# Altium PCB 3轴5.2-PCB-V3.3.PcbDoc (part 1 of 2)
Units mil, origin at the board's own origin, x right, y up, seen from the top; angles counter-clockwise.
Board outline 6000 x 4000 mil, 2 copper layers (Top Layer, Bottom Layer); 198 components, 135 nets, 695 pads, 606 vias.
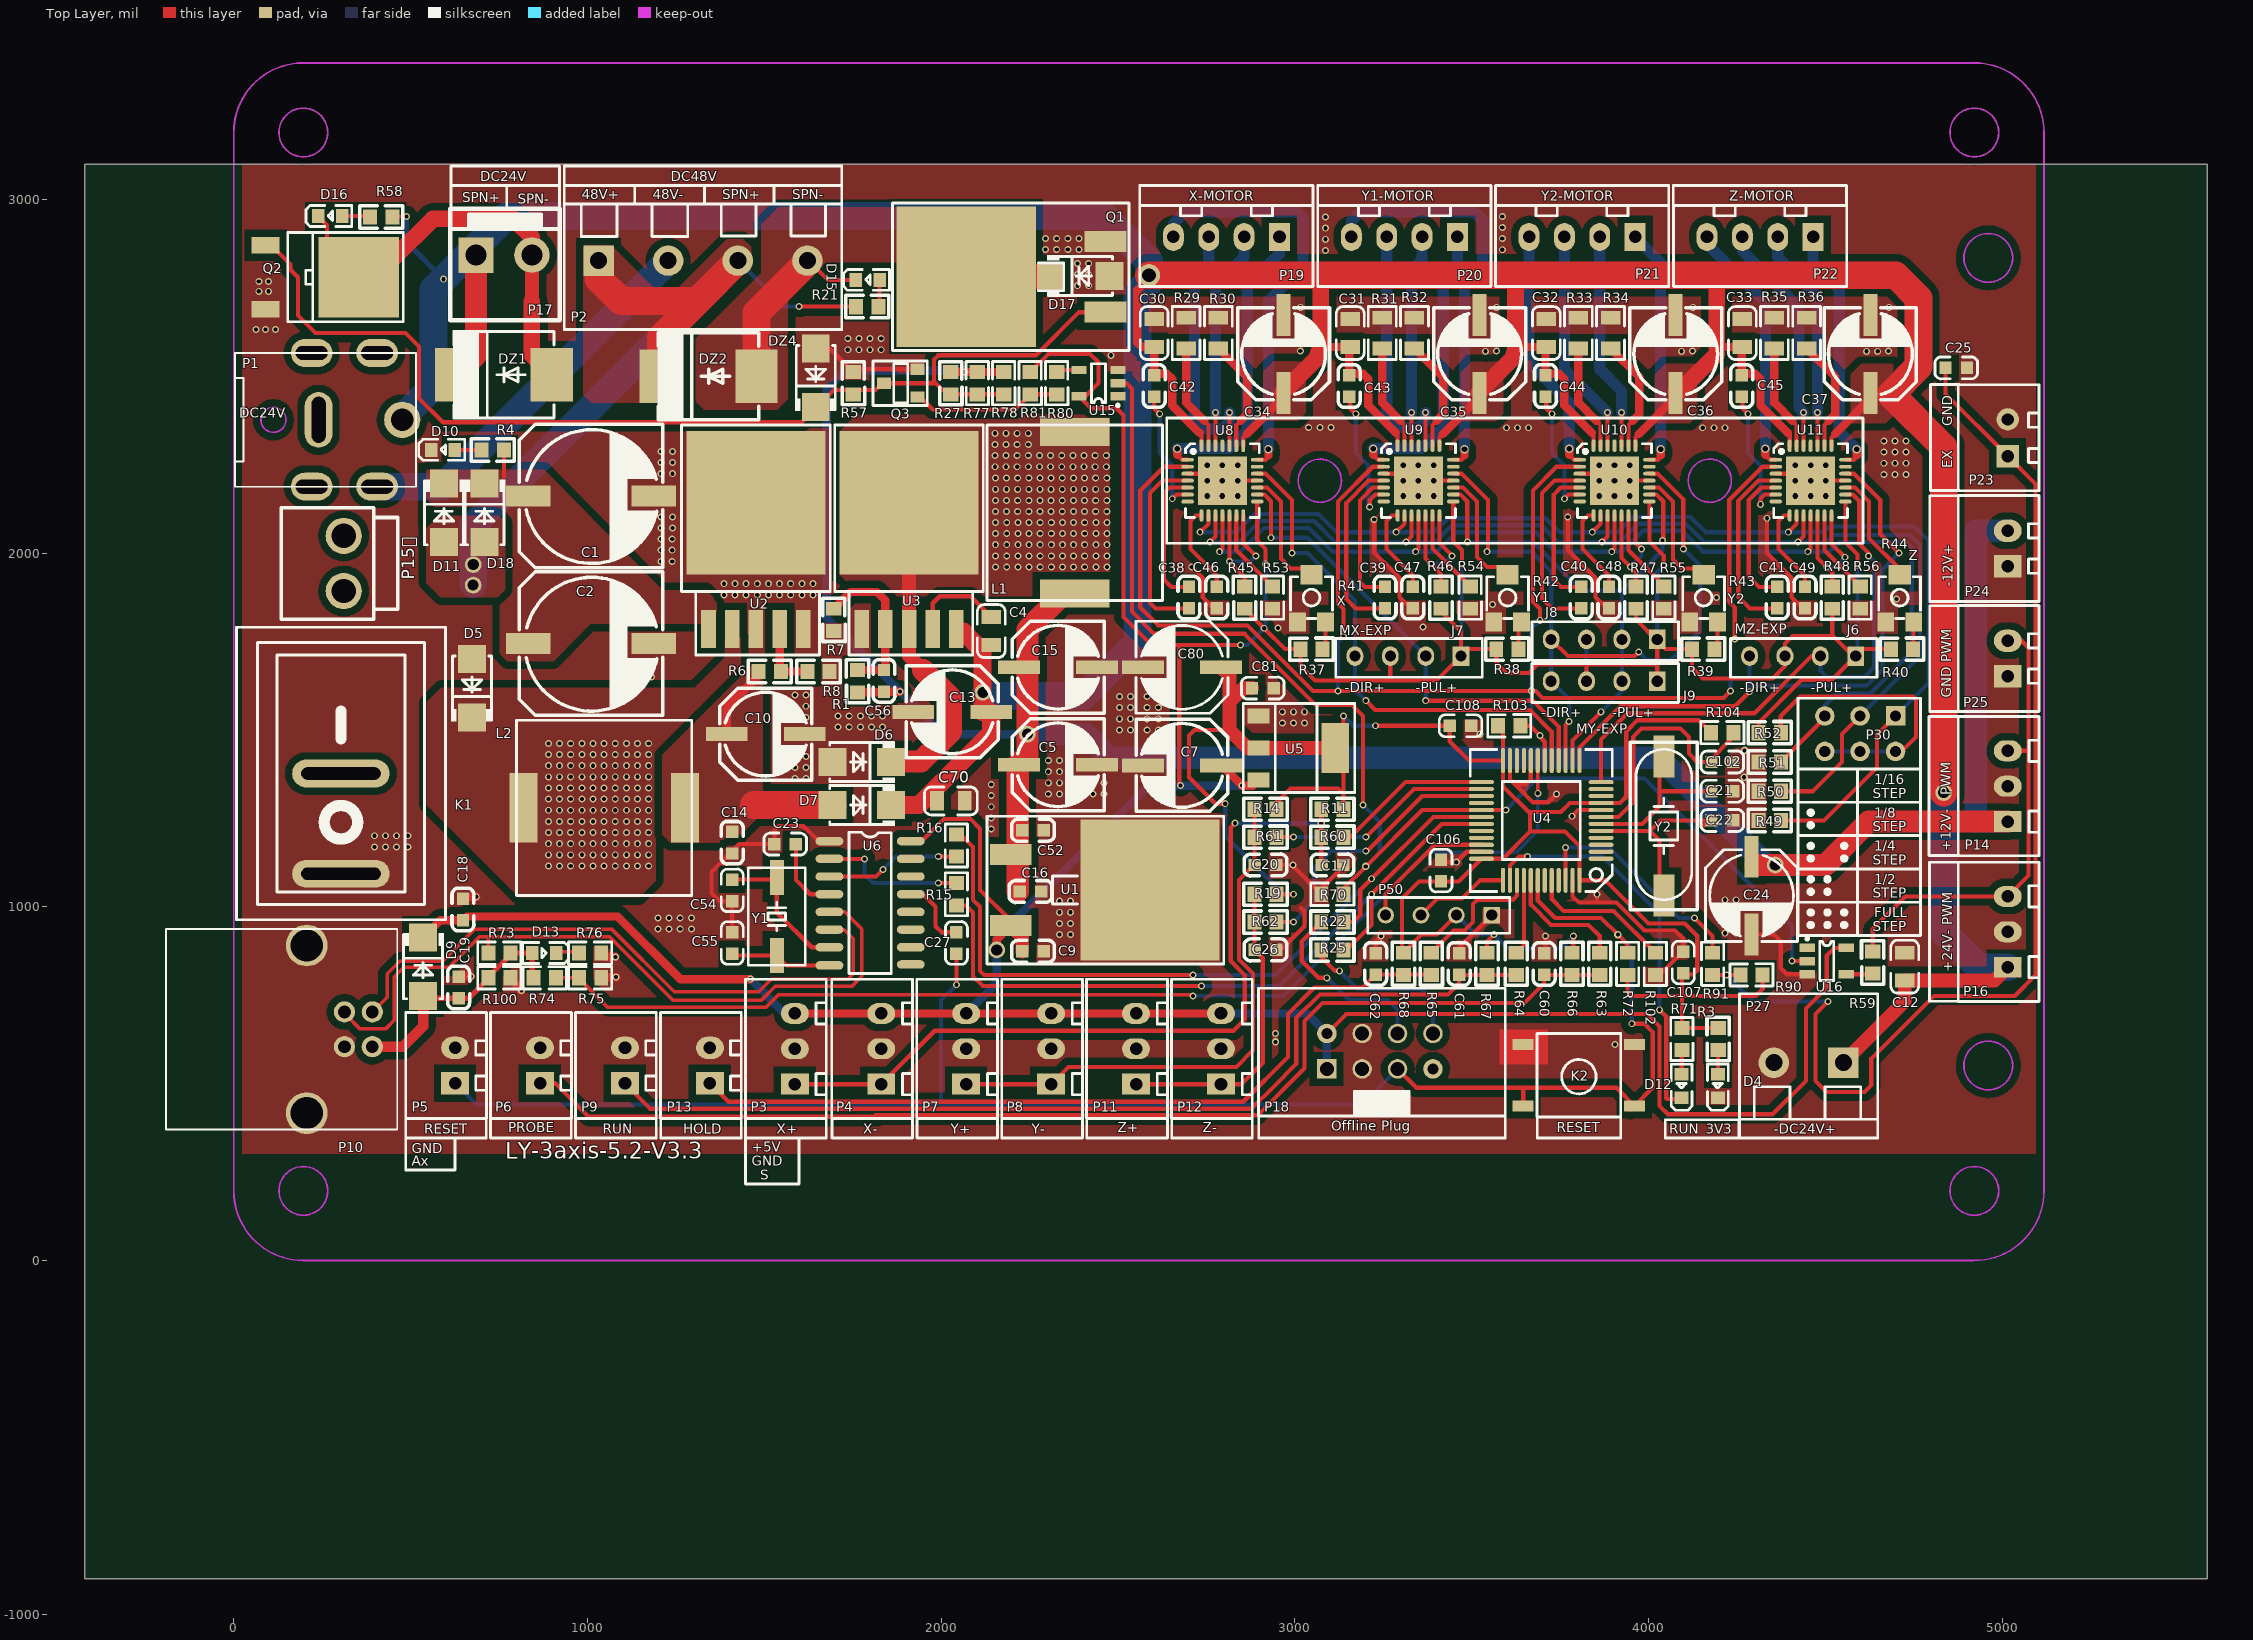
[diagram p0: Top Layer view]
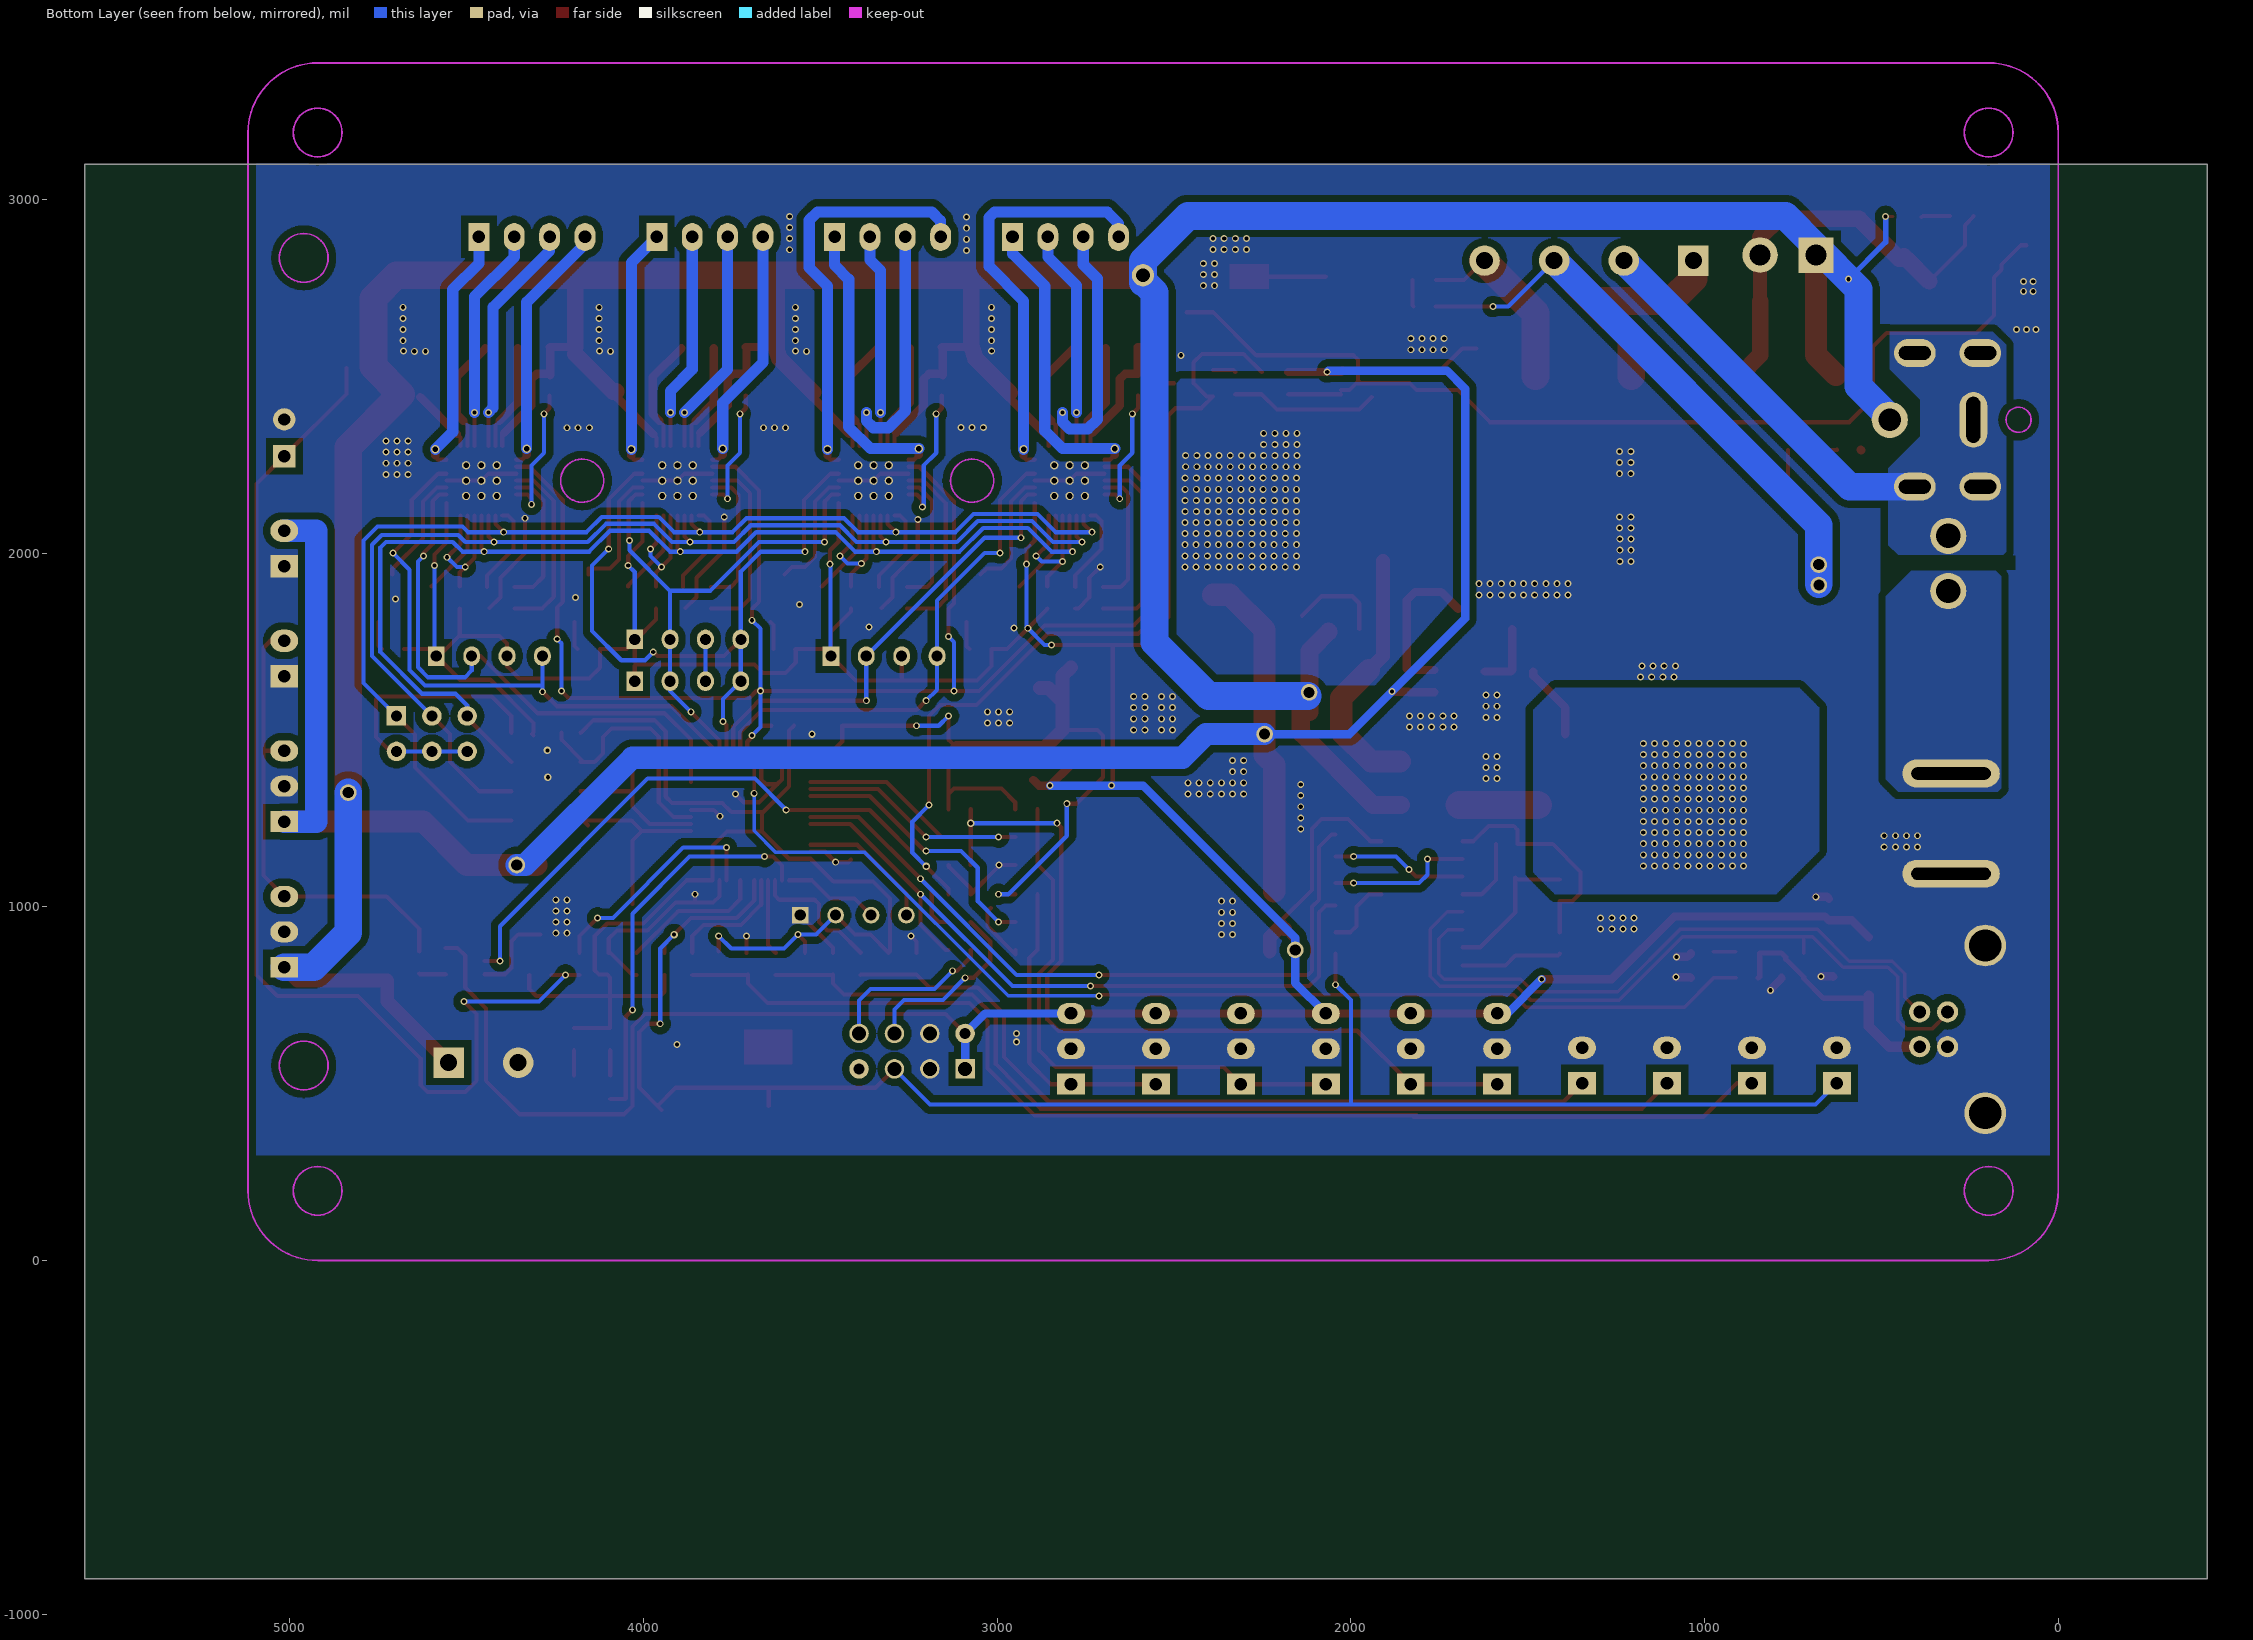
[diagram p1: Bottom Layer view, seen from below]

## Layer stack, top to bottom
Top Solder: solder mask 0.4, Solder Resist, Dk 3.5
Top Layer: signal copper 1.4
Dielectric1: dielectric 12.6, FR-4, Dk 4.8
Bottom Layer: signal copper 1.4
Bottom Solder: solder mask 0.4, Solder Resist, Dk 3.5

## Board outline
-420.71,-900.32 5579.29,-900.32 5579.29,3099.68 -420.71,3099.68

## Design rules (kind name [scope] priority, off if disabled: settings)
Clearance Polygon [InPolygon] p1: gap=20 ignorepadtopadclearanceinfootprint=FALSE
Clearance [All] p2: gap=7 ignorepadtopadclearanceinfootprint=FALSE except(0: Arc-Hole Track-Hole SMDPad-Hole THPad-Hole Via-Hole Fill-Hole Poly-Hole Region-Hole Text-Hole)
ComponentClearance [All] p1 off: gap=10 collisioncheckmode=3 verticalgap=10 showdistances=FALSE
HoleSize [All] p1: absolutevalues=TRUE maxlimit=1000 minlimit=1 maxpercent=80.000 minpercent=20.000
MinimumSolderMaskSliver [All] p1 off: minsoldermaskwidth=10
PolygonConnect [All] p1: connectstyle=Direct reliefconductorwidth=11.81 reliefentries=4 polygonreliefangle="90 Angle" airgapwidth=10
RoutingVias [All] p1: holewidth=23.62 width=31.5 viastyle="Through Hole" minholewidth=11.81 minwidth=11.81 maxholewidth=78.74 maxwidth=50
SilkToSilkClearance [All] p1 off: silktosilkclearance=10
SilkToSolderMaskClearance SilkscreenOverComponentPads [IsPad] p1 off: minsilkscreentomaskgap=10 clearancetoexposedcopper=TRUE
SolderMaskExpansion [All] p1: expansion=4
Width [All] p1: maxlimit=196.85 minlimit=0.39 preferedwidth=10
25 further rules are at their usual default settings.

## Components (designator, comment, footprint, x,y, rotation, side; value= is the part's Value field where it differs from the comment)
C1 "100uF/63V" 电解电容贴片10x10 1000,2157.48 r0 top
C2 "100uF/63V" 电解电容贴片10x10 1000,1740.16 r0 top
C4 "105" 0805C 2141.73,1779.53 r270 top
C5 "100uF/35V" 电解电容贴片6X6 2330.71,1401.57 r0 top
C7 "100uF/35V" 电解电容贴片6X6 2681.25,1399.82 r180 top
C9 "104" 0603C 2259.84,874.02 r180 top
C10 "100uF/35V" 电解电容贴片6X6 1503.94,1488.19 r0 top
C12 "105" 0805C 4724.41,830.71 r90 top
C13 "100uF/35V" 电解电容贴片6X6 2031.5,1551.18 r180 top
C14 "104" 0603C 1409.45,1181.1 r90 top
C15 "100uF/35V" 电解电容贴片6X6 2330.71,1677.17 r0 top
C16 "104" 0603C 2252.96,1043.31 r180 top
C17 "103" 0603C 3106.3,1118.11 r180 top
C18 "104" 0603C 648.18,992.13 r270 top
C19 "104" 0603C 635.83,771.65 r270 top
C20 "103" 0603C 2917.33,1118.11 r180 top
C21 "22pF" 0603C 4208.66,1326.77 r0 top
C22 "22pF" 0603C 4208.66,1244.09 r0 top
C23 "103" 0603C 1559.06,1177.17 r180 top
C24 "100uF/35V" 电解电容贴片6x6 4291.34,1031.5 r270 top
C25 "103?" 0603C 4870.08,2523.62 r180 top
C26 "103" 0603C 2917.33,877.95 r180 top
C27 "104" 0603C 2043.31,897.64 r270 top
C30 "105" 0805C 2602.36,2622.05 r90 top
C31 "105" 0805C 3156.69,2622.05 r90 top
C32 "105" 0805C 3711.02,2622.05 r90 top
C33 "105" 0805C 4265.35,2622.05 r90 top
C34 "47uF/50V" 电解电容贴片6X6 2968.24,2562.99 r90 top
C35 "47uF/50V" 电解电容贴片6X6 3522.58,2562.99 r90 top
C36 "47uF/50V" 电解电容贴片6X6 4076.91,2562.99 r90 top
C37 "47uF/50V" 电解电容贴片6X6 4627.3,2562.99 r90 top
C38 "104" 0603C 2700.79,1874.02 r90 top
C39 "104" 0603C 3255.12,1874.02 r90 top
C40 "104" 0603C 3809.45,1874.02 r90 top
C41 "104" 0603C 4363.78,1874.02 r90 top
C42 "104" 0603C 2602.36,2472.44 r90 top
C43 "104" 0603C 3153.54,2472.44 r90 top
C44 "104" 0603C 3708.66,2472.44 r90 top
C45 "104" 0603C 4263.78,2472.44 r90 top
C46 "224" 0603C 2779.53,1874.02 r270 top
C47 "224" 0603C 3333.86,1874.02 r270 top
C48 "224" 0603C 3888.19,1874.02 r270 top
C49 "224" 0603C 4442.52,1874.02 r270 top
C52 "104" 0603C 2259.84,1216.54 r180 top
C54 "33pF" 0603C 1409.45,1046.25 r270 top
C55 "33pF" 0603C 1409.45,897.64 r90 top
C56 "33nF" 0603C 1838.58,1638.79 r270 top
C60 "103" 0603C 3704.72,838.58 r270 top
C61 "103" 0603C 3464.57,838.58 r270 top
C62 "103" 0603C 3228.35,838.58 r270 top
C70 "105" 0805C 2027.56,1299.21 r0 top
C80 "100uF/35V" 电解电容贴片6x6 2681.1,1677.17 r180 top
C81 "104" 0603C 2909.45,1618.11 r180 top
C102 "104" 0603C 4208.66,1409.45 r180 top
C106 "104" 0603C 3413.39,1102.36 r270 top
C107 "104" 0603C 4098.43,842.52 r270 top
C108 "104" 0603C 3468.5,1511.81 r180 top
D4 "红光" 0603LED 4196.85,492.13 r270 top
D5 "SS56" SMA 673.77,1618.11 r90 top
D6 "SS56" SMA 1775.59,1409.45 r180 top
D7 "SS56" SMA 1775.59,1287.4 r180 top
D9 "SS56" SMA 535.43,830.71 r270 top
D10 "红光" 0603LED 590.55,2291.34 r180 top
D11 "SS56" SMA 594.49,2114.17 r270 top
D12 "绿光" 0603LED 4094.49,492.13 r270 top
D13 "红光" 0603LED 879.22,870.08 r0 top
D15 "绿光" 0603LED 1791.34,2771.65 r180 top
D16 "绿光" 0603LED 271.65,2952.42 r180 top
D17 "SS56" SMA 2393.7,2783.46 r0 top
D18 "SS56" SMA 708.66,2114.17 r270 top
DZ1 "快恢复二极管RS2M" SMC 763.78,2503.94 r0 top
DZ2 "快恢复二极管RS2M" SMC 1342.52,2500 r0 top
DZ4 "稳压二极管SMAZ10V" SMA 1645.67,2496.06 r90 top
J6 "4P" SIP4#1 4585.83,1708.66 r180 top
J7 "4P" SIP4#1 3470.08,1708.66 r180 top
J8 "4P" SIP4#1 4024.8,1755.91 r180 top
J9 "4P" SIP4#1 4024.8,1637.8 r180 top
K1 "按键" 船型开关KCD1-101 303.15,1376.77 r180 top
K2 "按键" 按键6x6贴片 3803.15,523.62 r270 top
L1 "47uH/5A" 电感贴片12X12 2377.95,2114.17 r270 top
L2 "47uH/5A" 电感贴片12X12 1047.24,1279.53 r0 top
P1 "DC007B" DC007B 3.94,2376.77 r180 top
P2 "KF300" 直插座4P-KF300 1031.5,2826.77 r0 top
P3 "3P" HDR1X3_CON 1586.61,598.43 r90 top
P4 "3P" HDR1X3_CON 1830.71,598.43 r90 top
P5 "2P" HDR1X2_CON#1 625.98,551.18 r90 top
P6 "2P" HDR1X2_CON#1 866.14,551.18 r90 top
P7 "3P" HDR1X3_CON 2070.87,598.43 r90 top
P8 "3P" HDR1X3_CON 2311.02,598.43 r90 top
P9 "2P" HDR1X2_CON#1 1106.3,551.18 r90 top
P10 "USB_TYPE-B" USB_TYPEB 299.21,653.54 r270 top
P11 "3P" HDR1X3_CON 2551.18,598.43 r90 top
P12 "3P" HDR1X3_CON 2791.34,598.43 r90 top
P13 "2P" HDR1X2_CON#1 1346.46,551.18 r90 top
P14 "3P" HDR1X3_CON 5015.75,1340.95 r90 top
P15 "2P-3.96" 2P-P3.96 311.02,1970.69 r270 top
P16 "3P" HDR1X3_CON 5015.75,929.13 r90 top
P17 "2P" VH3.96-2P直插座 769.71,2875.57 r180 top
P18 "8P" IDC8 3240.62,581.85 r0 top
P19 "4P" HDR1X4_CON 2956.69,2893.7 r180 top
P20 "4P" HDR1X4_CON 3459.84,2893.7 r180 top
P21 "4P" HDR1X4_CON 3962.2,2893.7 r180 top
P22 "4P" HDR1X4_CON 4465.35,2893.7 r180 top
P23 "2P" HDR1X2_CON#2 5015.75,2325.98 r90 top
P24 "2P红色" HDR1X2_CON#1 5015.75,2012.99 r90 top
P25 "2P" HDR1X2_CON#1 5015.75,1701.97 r90 top
P27 "KF300" 直插座2P-KF300 4551.18,559.06 r180 top
P30 "Header 3X2" HDR2X3 4698.43,1539.37 r180 top
P50 "" SIP4#2 3556.69,976.38 r180 top
Q1 "F540NS" TO-263-2 2464.57,2781.1 r0 top
Q2 "F50N06" TO-252 191.88,2779.98 r270 top
Q3 "SS8050" SOT-23 1885.83,2480.31 r90 top
R1 "16K" 0603R 1763.78,1637.8 r270 top
R3 "1K" 0603R 4196.85,625.98 r270 top
R4 "10K" 0603R 732.28,2291.34 r0 top
R6 "44.2K" 0603R 1515.75,1665.35 r180 top
R7 "1.8K" 0603R 1696.85,1811.03 r90 top
R8 "2.37K" 0603R 1653.54,1665.35 r180 top
R11 "10K" 0603R 3106.3,1275.59 r0 top
R14 "10K" 0603R 2917.33,1275.59 r0 top
R15 "680!!" 0603R 2043.31,1035.43 r270 top
R16 "100" 0603R 2043.31,1173.23 r90 top
R19 "10K" 0603R 2917.33,1035.43 r0 top
R21 "10K" 0603R 1791.34,2696.85 r0 top
R22 "100" 0603R 3106.3,956.69 r180 top
R25 "100" 0603R 3106.3,877.95 r180 top
R27 "1K" 0603R 2027.56,2480.31 r90 top
R29 "0.1" 0805R 2692.91,2622.05 r90 top
R30 "0.1" 0805R 2783.98,2622.05 r270 top
R31 "0.1" 0805R 3247.24,2622.05 r90 top
R32 "0.1" 0805R 3338.31,2622.05 r270 top
R33 "0.1" 0805R 3801.58,2622.05 r90 top
R34 "0.1" 0805R 3892.64,2622.05 r270 top
R35 "0.1" 0805R 4355.91,2622.05 r90 top
R36 "0.1" 0805R 4446.97,2622.05 r270 top
R37 "20K" 0603R 3047.25,1728.35 r180 top
R38 "20K" 0603R 3601.05,1728.35 r180 top
R39 "20K" 0603R 4154.86,1728.35 r180 top
R40 "20K" 0603R 4716.54,1728.35 r180 top
R41 "10K" 松下贴片电位器3x3 3047.24,1874.02 r0 top
R42 "10K" 松下贴片电位器3x3 3601.57,1874.02 r0 top
R43 "10K" 松下贴片电位器3x3 4155.91,1874.02 r0 top
R44 "10K" 松下贴片电位器3x3 4710.24,1874.02 r0 top
R45 "10K" 0603R 2858.27,1874.02 r90 top
R46 "10K" 0603R 3413.39,1874.02 r90 top
R47 "10K" 0603R 3964.57,1874.02 r90 top
R48 "10K" 0603R 4519.68,1874.02 r90 top
R49 "10K" 0603R 4342.52,1244.09 r180 top
R50 "10K" 0603R 4342.52,1326.77 r180 top
R51 "10K" 0603R 4342.52,1409.45 r180 top
R52 "100" 0603R 4342.52,1492.13 r0 top
R53 "0" 0603R 2937.01,1874.02 r90 top
R54 "0" 0603R 3496.06,1874.02 r90 top
R55 "0" 0603R 4043.31,1874.02 r90 top
R56 "0" 0603R 4598.43,1874.02 r90 top
R57 "10K" 0603R 1751.97,2480.32 r90 top
R58 "10K" 0603R 417.32,2950.06 r180 top
R59 "100" 0603R 4633.86,842.52 r90 top
R60 "100" 0603R 3106.3,1196.85 r180 top
R61 "100" 0603R 2917.33,1196.85 r180 top
R62 "100" 0603R 2917.33,956.69 r180 top
R63 "100" 0603R 3862.2,838.58 r270 top
R64 "100" 0603R 3625.98,838.58 r270 top
R65 "100" 0603R 3385.83,838.58 r270 top
R66 "10K" 0603R 3783.46,838.58 r90 top
R67 "10K" 0603R 3543.31,838.58 r90 top
R68 "10K" 0603R 3307.09,838.58 r90 top
R70 "10K" 0603R 3106.3,1035.43 r0 top
R71 "1K" 0603R 4094.49,625.98 r90 top
R72 "10K" 0603R 3940.94,838.58 r90 top
R73 "10K" 0603R 751.27,869.08 r180 top
R74 "1K?" 0603R 879.39,799.01 r0 top
R75 "1.8K" 0603R 1007.54,799.01 r0 top
R76 "1K" 0603R 1007.56,869.08 r180 top
R77 "1K" 0603R 2102.36,2480.31 r90 top
R78 "1K" 0603R 2177.17,2480.31 r90 top
R80 "100" 0603R 2326.77,2480.32 r270 top
R81 "10K" 0603R 2251.97,2480.32 r90 top
R90 "10K" 0603R 4291.34,807.09 r0 top
R91 "100" 0603R 4181.1,838.58 r270 top
R100 "1K!!" 0603R 751.27,799.21 r180 top
R102 "10k" 0603R 4019.68,838.58 r90 top
R103 "" 0603R 3606.3,1511.81 r180 top
R104 "10k" 0603R 4208.66,1492.13 r0 top
U1 "CJ7805" TO-263-2 2196.85,1047.24 r180 top
U2 "LM2576HVS-ADJ" TO-263 1476.38,1963.56 r0 top
U3 "XL4015" TO-263 1909.45,1963.56 r0 top
U4 "STM32F103C8T6/CBT6" LQFP48 3696.85,1244.09 r180 top
U5 "1117-3.3" SOT-223 3003.94,1448.82 r270 top
U6 "CH340G" SOP16 1799.21,1035.43 r0 top
U8 "HR4988SQ" QFN28 2805.36,2200.78 r270 top
U9 "HR4988SQ" QFN28 3359.69,2200.78 r270 top
U10 "HR4988SQ" QFN28 3914.03,2200.78 r270 top
U11 "HR4988SQ" QFN28 4468.36,2200.78 r270 top
U15 "74LVC1G04" SOT-23-5 2444.88,2480.31 r180 top
U16 "74LVC1G17" SOT-23-5 4503.94,846.46 r0 top
Y1 "12M" 晶振贴片49SSMD 1535.43,972.44 r90 top
Y2 "8M" 晶振贴片 4043.31,1228.35 r90 top

## Footprints (in the part's own frame and the unit in brackets; to place one, negate y for a bottom-side part, rotate by r counter-clockwise, add the part's x,y. Pads: shape width x height; smd on the part's side, far side on the other; paste and mask are expansions set on the pad)
2P-P3.96 [mm] "P5"
  round 2.6 hole 1.75: 1(-1.98,0) 2(1.98,0)
  silkscreen extent -4,-4.48 4,3.87
0603C [mil]
  rect 35x35 smd: 1(-30.5,0) 2(30.5,0)
  silkscreen extent -60,-31 60,31
0603LED [mm]
  rect 0.9x1 smd: 1(-0.884,-0.017) 2(0.816,-0.017)
  silkscreen extent -1.58,-0.77 1.72,0.73
0603R [mm]
  rect 1x1.1 smd: 1(-0.8,0) 2(0.8,0)
  silkscreen extent -1.55,-0.8 1.55,0.81
0805C [mm] "Chip Capacitor; Body 2.0 x 1.2 mm (LxW typ)"
  rect 1x1.4 smd: 1(-1,0) 2(1,0)
  silkscreen extent -1.9,-1 1.9,1
0805R [mm] "Chip Capacitor; Body 2.0 x 1.2 mm (LxW typ)"
  rect 1x1.4 smd: 1(-1.1,0) 2(1.1,0)
  silkscreen extent -1.9,-1 1.9,1
DC007B [mm]
  round 2.6 hole 1.6: 1(-12,0)
  oval 2x4 hole 1 slot 3.3 at 90 deg: 2(-6,0)
  oval 3x2 hole 1 slot 2.3 at 0 deg: 3(-5.5,4.8) 4(-10.2,4.8) 5(-5.5,-4.8) 6(-10.2,-4.8)
  Keep-Out Layer circle w0.127: c-2.75,0 r0.9
  silkscreen extent -13,-4.8 0,4.8
HDR1X2_CON#1 [mm] "Connector; Header; 3 Position"
  rect 1.6x2 hole 0.9: 1(-1.27,0)
  oval 1.6x2 hole 0.9: 2(1.27,0)
  silkscreen extent -3.8,-2.25 3.8,3.55
HDR1X2_CON#2 [mm] "Connector; Header; 3 Position"
  rect 1.6x1.6 hole 0.88: 1(-1.32,0)
  round 1.6 hole 0.88: 2(1.32,0)
  silkscreen extent -3.8,-2.25 3.8,3.55
HDR1X3_CON [mm] "Connector; Header; 3 Position"
  rect 1.5x2 hole 0.9: 1(-2.54,0)
  oval 1.5x2 hole 0.9: 2(0,0) 3(2.54,0)
  silkscreen extent -5,-2.25 5,3.55
HDR1X4_CON [mm] "Connector; Header; 4 Position"
  rect 1.5x2 hole 0.9: 1(0,0)
  oval 1.5x2 hole 0.9: 2(2.54,0) 3(5.08,0) 4(7.62,0)
  silkscreen extent -2.41,-2.25 10.03,3.55
HDR2X3 [mm] "Connector; Header; 13x2 Position"
  rect 1.4x1.4 hole 0.8: 1(0,0)
  round 1.4 hole 0.8: 2(0,2.54) 3(2.54,0) 4(2.54,2.54) 5(5.08,0) 6(5.08,2.54)
  silkscreen extent -1.8,-1.27 7,3.81
IDC8 [mm]
  rect 1.4x1.4 hole 1: 1(-3.812,-1.019)
  round 1.4 hole 0.8: 2(-3.812,1.521) 7(3.808,-1.019)
  round 1.4 hole 1: 3(-1.272,-1.019) 4(-1.272,1.521) 5(1.268,-1.019) 6(1.268,1.521) 8(3.808,1.521)
  silkscreen extent -8.72,-4.41 9,4.77
LQFP48 [mm] "48-Pin Thin Quad Flat Pack 0.5 mm Pitch, IPC Low Density"
  oval 1.8x0.3 smd: 1(-4.3,2.75) 2(-4.3,2.25) 3(-4.3,1.75) 4(-4.3,1.25) 5(-4.3,0.75) 6(-4.3,0.25) 7(-4.3,-0.25) 8(-4.3,-0.75) 9(-4.3,-1.25) 10(-4.3,-1.75) 11(-4.3,-2.25) 12(-4.3,-2.75) 25(4.3,-2.75) 26(4.3,-2.25) 27(4.3,-1.75) 28(4.3,-1.25) 29(4.3,-0.75) 30(4.3,-0.25) 31(4.3,0.25) 32(4.3,0.75) 33(4.3,1.25) 34(4.3,1.75) 35(4.3,2.25) 36(4.3,2.75)
  oval 0.3x1.8 smd: 13(-2.75,-4.3) 14(-2.25,-4.3) 15(-1.75,-4.3) 16(-1.25,-4.3) 17(-0.75,-4.3) 18(-0.25,-4.3) 19(0.25,-4.3) 20(0.75,-4.3) 21(1.25,-4.3) 22(1.75,-4.3) 23(2.25,-4.3) 24(2.75,-4.3) 37(2.75,4.3) 38(2.25,4.3) 39(1.75,4.3) 40(1.25,4.3) 41(0.75,4.3) 42(0.25,4.3) 43(-0.25,4.3) 44(-0.75,4.3) 45(-1.25,4.3) 46(-1.75,4.3) 47(-2.25,4.3) 48(-2.75,4.3)
  silkscreen extent -5.1,-5.1 5.1,5.1
QFN28 [mm]
  oval 0.28x0.896 smd: 1(-1.601,-2.756) 2(-1.101,-2.756) 3(-0.601,-2.756) 4(-0.1,-2.756) 5(0.4,-2.756) 6(0.901,-2.756) 7(1.401,-2.756) 15(1.401,2.244) 16(0.901,2.244) 17(0.4,2.244) 18(-0.1,2.244) 19(-0.601,2.244) 20(-1.101,2.244) 21(-1.601,2.244)
  oval 0.896x0.28 smd: 8(2.4,-1.757) 9(2.4,-1.257) 10(2.4,-0.757) 11(2.4,-0.256) 12(2.4,0.244) 13(2.4,0.745) 14(2.4,1.245) 22(-2.6,1.245) 23(-2.6,0.745) 24(-2.6,0.244) 25(-2.6,-0.256) 26(-2.6,-0.757) 27(-2.6,-1.257) 28(-2.6,-1.757)
  rect 3.5x3.5 smd: 29(-0.1,-0.256)
  silkscreen extent -2.75,-2.91 2.55,2.39
SIP4#1 [mm] "Connector; Header; 4 Position"
  rect 1.2x1.4 hole 0.8: 1(0,0)
  oval 1.2x1.4 hole 0.8: 2(2.54,0) 3(5.08,0) 4(7.62,0)
  silkscreen extent -1.52,-1.27 9,1.52
SIP4#2 [mm] "Connector; Header; 4 Position"
  rect 1.2x1.2 hole 0.8: 1(0,0)
  round 1.2 hole 0.8: 2(2.54,0) 3(5.08,0) 4(7.62,0)
  silkscreen extent -1.3,-1.27 8.9,1.3
SMA [mm]
  rect 2x2 smd: 1(2.1,0) 2(-2.1,0)
  silkscreen extent -2.4,-1.4 2.3,1.5
SMC [mm]
  rect 3.03x3.82 smd: 1(3.435,0) 2(-3.435,0)
  silkscreen extent -3.66,-3.11 3.6,3.11
SOP16 [mm] "1.27mm Pitch,"
  oval 2x0.6 smd: 1(-2.921,3.81) 2(-2.921,2.54) 3(-2.921,1.27) 4(-2.921,0) 5(-2.921,-1.27) 6(-2.921,-2.54) 7(-2.921,-3.81) 8(-2.921,-5.11) 9(2.921,-5.04) 10(2.921,-3.81) 11(2.921,-2.54) 12(2.921,-1.27) 13(2.921,0) 14(2.921,1.27) 15(2.921,2.54) 16(2.921,3.81)
  silkscreen extent -1.52,-5.7 1.52,4.44
SOT-23 [mm]
  rect 0.8x1 smd: 1(-1,-1.2) 2(0,1.2) 3(1,-1.2)
  silkscreen extent -1.6,-1.9 1.6,2
SOT-23-5 [mm]
  rect 1.1x0.6 smd: 1(-1.4,0.95) 2(-1.4,0) 3(-1.4,-0.95) 4(1.4,-0.95) 5(1.4,0.95)
  silkscreen extent -1.5,-1.4 0.5,1.7
SOT-223 [mm] "SOT-223/SC-73; 4 Leads; Body 6.7 x 7.3 mm, inc. leads (LxW max)"
  rect 1.1x1.6 smd: 1(-2.3,-2.7) 2(0,-2.7) 3(2.3,-2.7)
  rect 3.6x2 smd: 4(0,2.8)
  silkscreen extent -3.2,-3.8 3.2,4.2
TO-252 [mm]
  rect 1.2x2 smd: 1(-2.3,-2.6) 3(2.3,-2.6)
  rect 5.8x5.8 smd: 2(0,4.1)
  silkscreen extent -3.2,-1 3.2,7.3
TO-263 [mm]
  rect 1.05x2.7 smd: 1(-3.4,-4.525) 2(-1.7,-4.525) 3(0,-4.525) 4(1.7,-4.525) 5(3.4,-4.525)
  rect 10x10.3 smd: 3(0,4.526)
  silkscreen extent -5.33,-6.4 5.33,10.11
TO-263-2 [mm]
  rect 3x1.5 smd: 1(0,-2.54) 3(0,2.54)
  rect 10x10.1 smd: 2(-10,0)
  silkscreen extent -15.3,-5.3 1.7,5.3
USB_TYPEB [mm] "方口卧插USB_TYPEB"
  round 1.524 hole 0.92: 1(1.25,2.355) 2(-1.25,2.355) 3(-1.25,0.355) 4(1.25,0.355)
  round 3 hole 2.3: 5(-6.02,-2.355) 6(6.02,-2.355)
  silkscreen extent -7.2,-12.45 7.2,4.15
VH3.96-2P直插座 [mil]
  rect 100x100 hole 60: 1(84.67,33.05)
  round 100 hole 60: 2(-73.33,33.05)
  silkscreen extent -152,-98 158,217
按键6x6贴片 [mm]
  rect 0.8x1.5 smd: 1(2.2,4) 2(-2.2,4) 3(2.2,-4) 4(-2.2,-4)
  silkscreen extent -3,-3 3,3
晶振贴片 [mm]
  rect 3x1.5 smd: 1(-5,0) 2(5,0)
  silkscreen extent -6,-2.4 6,2.4
晶振贴片49SSMD [mm]
  rect 2.5x1 smd: 1(-2.8,0) 2(2.8,0)
  silkscreen extent -3.5,-2.05 3.5,2.05
松下贴片电位器3x3 [mm]
  rect 1.2x1.4 smd: 1(-1,-1.75) 3(1,-1.75)
  rect 1.6x1.4 smd: 2(0,1.65)
  silkscreen extent -1.5,-1.5 1.5,1.5
电感贴片12X12 [mm]
  rect 2x5 smd: 1(-5.8,0) 2(5.8,0)
  silkscreen extent -6.3,-6.3 6.3,6.3
电解电容贴片6X6 [mm]
  rect 3x1 smd: 1(-2.8,0) 2(2.8,0)
  silkscreen extent -3.3,-3.3 3.3,3.3
电解电容贴片6x6 [mm]
  rect 3x1 smd: 1(-2.8,0) 2(2.8,0)
  silkscreen extent -3.3,-3.3 3.3,3.3
电解电容贴片10x10 [mm]
  rect 3.2x1.5 smd: 1(-4.242,0.097) 2(4.758,0.097)
  silkscreen extent -4.89,-5.05 5.41,5.25
直插座2P-KF300 [mil]
  rect 86x86 hole 48: 1(0,0)
  round 86 hole 48: 2(196.85,0)
  silkscreen extent -97,-195 294,160
直插座4P-KF300 [mil]
  rect 86x86 hole 48: 1(0,0)
  round 86 hole 48: 2(196.85,0) 3(393.7,0) 4(590.55,0)
  silkscreen extent -97,-195 688,160
船型开关KCD1-101 [mm]
  oval 7x2 hole 0.88 slot 5.7 at 0 deg: 1(0,0) 2(0,7.2)
  silkscreen extent -7.5,-10.5 7.5,10.5

## Part data
C1 C2 C5 C7 C10 C13 C15 C24 C34 C35 C36 C37 C80: library part ELECTRO1
C4 C12 C14 C16 C17 C20 C25 C26 C30 C31 C32 C33 C38 C39 C40 C41 C42 C43 C44 C45 C46 C47 C48 C49 C56 C60 C61 C62 C70 C106 C107 C108: library part CAP
C9 C18 C19 C21 C22 C23 C27 C52 C54 C55 C81 C102: library part "Cap Semi", "Capacitor (Semiconductor SIM Model)"
D4 D10 D12 D13 D15 D16: library part LED
D5 D6 D7 D9 D11 D17 D18: library part 1N4148
DZ1 DZ2 DZ4: library part 稳压二极管
L1 L2: library part Inductor, "Inductor"
P1: library part 6P
P2 P50: library part 4P
P24 P27: library part 2P
P30: "Header, 3-Pin, Dual row"
Q1 Q2: library part MOSFET-N, "N-Channel MOSFET"
Q3: library part NPN
R1 R3 R4 R6 R7 R8 R11 R14 R15 R16 R19 R21 R22 R25 R27 R29 R30 R31 R32 R33 R34 R35 R36 R37 R38 R39 R40 R45 R46 R47 R48 R49 R50 R51 R52 R53 R54 R55 R56 R57 R58 R59 R60 R61 R62 R63 R64 R65 R66 R67 R68 R70 R71 R72 R73 R74 R75 R76 R77 R78 R80 R81 R90 R91 R100 R102 R103 R104: library part RES, "Resistor"
R41 R42 R43 R44: library part 电位器
U1: library part 7805
U2: library part LM2576S-5.0, "Simple Switcher 3A Step Down Voltage Regulator"
U3: library part XL4005
U4: library part STM32F103C6T6, "STM32 ARM-based 32-bit MCU with 32 Kbytes Flash, 48-pin LQFP, Industrial Temperature"
U5: library part LM1117
U6: library part DIP16
U8 U9 U10 U11: library part HR4988
U15: library part 74LVC1G17
Y1 Y2: library part XTAL, "Crystal Oscillator"

## Free pads (board coordinates)
  round 62.99 hole 39.37: 0(2587.94,2785.37)
  round 23.62 hole 15.75: 0(2667.32,2295.28) 0(3221.65,2295.28) 0(3775.98,2295.28) 0(4330.31,2295.28) 3(2925.48,2293.59) 3(3479.81,2293.59) 3(4034.14,2293.59) 3(4588.47,2293.59) 4(2795.28,2248.03) 4(3349.61,2248.03) 4(3903.94,2248.03) 4(4458.27,2248.03) 5(2751.97,2161.41) 5(2751.97,2204.72) 5(2751.97,2248.03) 5(2795.28,2161.41) 5(2795.28,2204.72) 5(2838.58,2161.41) 5(2838.58,2204.72) 5(2838.58,2248.03) 5(3306.3,2161.41) 5(3306.3,2204.72) 5(3306.3,2248.03) 5(3349.61,2161.41) 5(3349.61,2204.72) 5(3392.91,2161.41) 5(3392.91,2204.72) 5(3392.91,2248.03) 5(3860.63,2161.41) 5(3860.63,2204.72) 5(3860.63,2248.03) 5(3903.94,2161.41) 5(3903.94,2204.72) 5(3947.24,2161.41) 5(3947.24,2204.72) 5(3947.24,2248.03) 5(4414.96,2161.41) 5(4414.96,2204.72) 5(4414.96,2248.03) 5(4458.27,2161.41) 5(4458.27,2204.72) 5(4501.57,2161.41) 5(4501.57,2204.72) 5(4501.57,2248.03)
  rrect70% 23.62x62.99 on Top Overlay: 0(4460.63,1342.52) 0(4507.87,1153.94) 0(4507.87,1248.03) 0(4507.87,1342.52) 0(4555.12,1059.84) 0(4555.12,1248.03) 0(4555.12,1342.52)
  round 47.24 hole 31.5: 1(676.92,1909.45) 1(677.17,1967.39) 1(2118.11,1606.3) 1(2157.48,877.95) 1(2244.09,1488.19) 1(4358.27,1118.11) 1(4834.65,1322.83)

## Via types
v1: diameter 19.68, hole 11.81, Top Layer to Bottom Layer, 590 vias
v2: diameter 20.87, hole 11.81, Top Layer to Bottom Layer, 9 vias
v3: diameter 19.68, hole 11.81, Top Layer to Bottom Layer, tented both sides, 7 vias

## Nets (pads, with @x,y where several pads share a name; then routed paths per layer and width w, separated by ;. In a path a pad name is that pad's centre, name@x,y a point inside that pad or via, vN(x,y) a via of type N, cw(c..) or ccw(c..) an arc to the next point about the centre after c; other vN are vias at no path point)
3V3: C80.1 C81.2 C106.2 C107.2 C108.2 P50.2 R3.1 R11.2 R14.2 R19.2 R66.2 R67.2 R68.2 R71.2 R72.1 R90.2 R103.2 R104.1 U4.9 U4.24 U4.36 U4.48 U5.2 U5.4 | length 6285.3
  Top Layer w11.81: v1(2803.15,1291.34) 2775.59,1291.34 2700.79,1366.14 2700.79,1484.25 2716.54,1500 2814.96,1500 ; R19.2@2948.82,1035.43 v1(2996.06,1035.43) ; R14.2@2948.82,1275.59 2948.82,1295.28 2988.19,1334.65 3122.05,1334.65 3137.8,1318.9 ; R11.2@3137.8,1275.59 3137.8,1318.9 ; v1(3137.8,1539.37) 3137.8,1472.44 U5.4@3114.17,1448.82 3137.8,1425.2 3137.8,1318.9 ; v1(3228.35,1511.81) C108.2@3438,1511.81 3438,1467.51 3492.13,1413.39 U4.24@3588.58,1413.39 ; P50.2@3456.69,976.38 3401.57,921.26 3358.27,921.26 R68.2@3307.09,870.08 3303.15,874.01 3303.15,1023.62 3351.39,1071.86 C106.2@3413.39,1071.86 3463.59,1071.86 U4.36@3527.56,1135.83 3588.58,1135.83 3665.35,1212.6 ; R67.2@3543.31,870.08 3543.31,901.57 v1(3562.99,921.26) ; R103.2@3574.81,1511.81 3588.58,1498.03 U4.24@3588.58,1413.39 ; R66.2@3787.4,874.01 v1(3787.4,917.32) ; R72.1@3940.94,807.09 3940.94,759.84 3952.76,748.03 4090.55,748.03 ; R104.1@4177.17,1492.13 4141.73,1527.56 3968.5,1527.56 3937.01,1496.06 3937.01,1311.02 3919.29,1293.31 U4.9@3866.14,1293.31 3777.56,1293.31 3751.97,1267.72 3661.42,1267.72 ; R3.1@4196.85,657.48 R71.2@4094.49,657.48 4094.49,748.03 ; R90.2@4322.83,807.09 4322.83,767.71 4303.15,748.03 4094.49,748.03 ; U4.24@3588.58,1413.39 3588.58,1340.55 3661.42,1267.72 ; 3661.42,1267.72 3665.35,1263.78 3665.35,1212.6 ; 3665.35,1212.6 3763.78,1212.6 3805.12,1171.26 U4.48@3805.12,1074.8 3877.95,1074.8 4000,952.76 4102.36,952.76 4137.8,917.32 4137.8,870.08 4137.8,819.89 4125.98,808.08 4102.36,808.08 4094.49,800.21 4094.49,748.03
  Top Layer w39.37: C80.1@2791.34,1677.17 2814.96,1653.54 2814.96,1578.75 ; C81.2@2878.95,1618.11 2854.33,1618.11 2814.96,1578.75 ; U5.4@3114.17,1448.82 U5.2@2897.64,1448.82 2866.14,1448.82 2814.96,1500 2814.96,1578.75
  Bottom Layer w11.81: v1(2803.15,1291.34) 2803.15,1200.79 2968.5,1035.43 v1(2996.06,1035.43) ; v1(3137.8,1539.37) 3165.35,1511.81 v1(3228.35,1511.81) ; P50.2@3456.69,976.38 3511.81,921.26 v1(3562.99,921.26) 3602.36,881.89 3751.97,881.89 v1(3787.4,917.32)
12V: C5.1 C15.1 C16.2 C24.1 C52.2 C56.2 L1.2 P14.1 P24.2 pad.1@2244.09,1488.19 pad.1@4358.27,1118.11 R1.2 R27.2 R77.2 R78.2 U1.1 | length 7009.3
  Top Layer w23.62: R1.2@1763.78,1606.3 1836.59,1606.3 C56.2@1838.58,1608.29 v1(1883.88,1608.29) ; R27.2@2023.62,2515.75 R27.2@2027.56,2511.81 v1(2066.93,2511.81) R77.2@2102.36,2511.81 R78.2@2177.17,2511.81
  Top Layer w62.99: C16.2@2216.54,1043.31 2216.54,1401.57 2244.09,1429.13 2244.09,1783.46 2342.52,1881.89 L1.2@2389.76,1881.89 ; C24.1@4303.15,1118.11 pad.1@4358.27,1118.11 4500,1118.11 4622.83,1240.95 P14.1@5015.75,1240.95
  Bottom Layer w23.62: v1@2064.09,2515.75 1728.35,2515.75 1677.17,2464.57 1677.17,1815.01 v1(1883.88,1608.29) 2003.98,1488.19 pad.1@2244.09,1488.19
  Bottom Layer w62.99: pad.1@2244.09,1488.19 2409.45,1488.19 2476.38,1421.26 4031.5,1421.26 4334.65,1118.11 pad.1@4358.27,1118.11 ; P14.1@5015.75,1240.95 5014.96,1240.16 4925.2,1240.16 4925.2,2062.99 P24.2@5015.75,2062.99
24V: C4.2 C12.1 C13.1 C30.1 C31.1 C32.1 C33.1 C34.1 C35.1 C36.1 C37.1 C42.2 C43.2 C44.2 C45.2 C70.1 D7.2 DZ1.2 P1.1 P16.1 P17.1 P27.1 pad.0@2587.94,2785.37 pad.1@2118.11,1606.3 pad.1@4834.65,1322.83 R58.1 U3.5 U8.22 U8.28 U9.22 U9.28 U10.22 U10.28 U11.22 U11.28 | length 14151
  Top Layer w8: R58.1@467.53,2952.03 v3(488.19,2952.03)
  Top Layer w11.81: U8.28@2736.18,2303.14 2736.18,2334.69 ; U8.22@2854.38,2303.14 2854.38,2326.82 2862.2,2334.65 ; U9.28@3290.51,2303.14 3290.51,2334.69 ; U9.22@3408.71,2303.14 3408.71,2326.82 3416.54,2334.65 ; U10.28@3844.84,2303.14 3844.84,2334.69 ; U10.22@3963.04,2303.14 3963.04,2326.82 3970.87,2334.65 ; U11.28@4399.17,2303.14 4399.17,2334.69 ; U11.22@4517.37,2303.14 4517.37,2326.82 4525.2,2334.65
  Top Layer w23.62: pad.0@2587.94,2769.62 2554.08,2743.64 2554.08,2595.98 2567.38,2582.68 C30.1@2602.36,2582.68 2602.36,2506.88 2638.79,2506.88 2653.54,2492.13 2653.54,2417.32 2731.16,2339.71 ; 2864.17,2336.61 2968.24,2440.69 C34.1@2968.24,2452.76 C34.1@2968.24,2456.69 ; 3072.02,2582.68 C31.1@3156.69,2582.68 3153.54,2579.53 C43.2@3153.54,2502.94 ; C43.2@3156.69,2506.88 3193.12,2506.88 3207.87,2492.13 3207.87,2417.32 3285.49,2339.71 ; 3418.5,2336.61 C35.1@3522.58,2440.69 ; 3623.68,2582.68 C32.1@3711.02,2582.68 3708.66,2580.31 C44.2@3708.66,2502.94 ; C44.2@3711.02,2506.88 3747.45,2506.88 3762.2,2492.13 3762.2,2417.32 3839.82,2339.71 ; 3972.83,2336.61 C36.1@4076.91,2440.69 ; 4192.91,2582.68 C33.1@4265.35,2582.68 4263.78,2581.1 C45.2@4263.78,2502.94 ; C45.2@4265.35,2506.88 4301.78,2506.88 4316.54,2492.13 4316.54,2417.32 4394.15,2339.71 ; 4527.17,2336.61 C37.1@4631.24,2440.69
  Top Layer w39.37: P27.1@4551.18,559.06 4724.41,732.28 C12.1@4724.41,791.34 4977.95,791.34 P16.1@5015.75,829.13
  Top Layer w47.24: pad.0@2587.94,2769.62 pad.0@2601.79,2783.46 ; C34.1@2965.16,2453.6 2968.24,2456.69 3061.48,2549.93 3072.02,2582.68 ; 3073.29,2586.61 3073.29,2769.62 ; C35.1@3520.61,2454.72 3615.81,2549.93 3623.68,2574.8 ; 3623.68,2582.68 3623.68,2769.62 ; C36.1@4076.91,2456.69 4086.95,2456.69 4192.91,2562.66 ; 4192.91,2582.68 4192.91,2769.62
  Top Layer w51.18: D7.2@1858.27,1287.4 1937.01,1287.4 2141.73,1492.13 C13.1@2141.73,1551.18 ; U3.5@2062.99,1777.52 2117.02,1723.5 C13.1@2117.02,1551.18
  Top Layer w62.99: DZ1.2@628.54,2503.94 685.04,2560.43 P17.1@685.04,2842.52 P17.1@685.04,2850.39
  Top Layer w78.74: pad.0@2587.94,2785.37 4698.88,2785.37 4763.78,2720.47 4763.78,2527.13 4685.25,2448.6 4834.65,2299.21 pad.1@4834.65,1322.83
  Bottom Layer w15: v3(488.19,2952.03) 488.19,2879.2 v3(593.14,2774.24)
  Bottom Layer w47.24: 4911.02,829.13 4933.07,829.13
  Bottom Layer w62.99: P17.1@685.04,2842.52 661.42,2842.52 P17.1@685.04,2866.14
  Bottom Layer w78.74: P1.1@476.38,2376.77 476.38,2383.16 564.96,2471.75 564.96,2746.06 v3(593.14,2774.24) P17.1@661.42,2842.52 ; P17.1@685.04,2842.52 685.04,2866.14 771.65,2952.76 2460.63,2952.76 2587.94,2825.44 pad.0@2587.94,2785.37 pad.0@2587.94,2769.62 ; pad.1@2121.93,1595.46 2402.55,1595.46 2555.12,1748.03 2555.12,2736.8 pad.0@2587.94,2769.62 ; pad.0@2587.94,2764.98 pad.0@2587.94,2769.62 ; pad.1@4834.65,1322.83 4834.65,927.56 4933.07,829.13 P16.1@5015.75,829.13
48V1: C1.1 C2.1 D11.2 D18.2 R4.2 U2.1 | length 74.8
  Top Layer w11.81: 763.78,2216.54 R4.2@763.78,2291.34
48V_IN: D11.1 D18.1 DZ2.2 P2.1 P2.3 pad.1@676.92,1909.45 pad.1@677.17,1967.39 R21.1 | length 2386.3
  Top Layer w11.81: v1(1598.43,2696.85) R21.1@1759.84,2696.85
  Top Layer w78.74: P2.1@1031.5,2826.77 1031.5,2775.59 1094.49,2712.59 1311.02,2712.59 ; DZ2.2@1207.28,2500 1207.28,2608.86 1311.02,2712.59 ; P2.3@1425.2,2826.77 1311.02,2712.59
  Bottom Layer w11.81: P2.3@1425.2,2826.77 1555.12,2696.85 v1(1598.43,2696.85)
  Bottom Layer w78.74: pad.1@677.17,1912.6 pad.1@677.17,1967.39 677.17,2078.74 P2.3@1425.2,2826.77
48V_SPN-: D15.2 D17.2 DZ2.1 P2.4 Q1.2 | length 769.6
  Top Layer w11.81: P2.4@1637.55,2814.96 1680.19,2772.32 D15.2@1759.21,2772.32 ; Q1.2@2070.87,2781.1 2308.66,2781.1 D17.2@2311.02,2783.46
  Top Layer w78.74: DZ2.1@1477.76,2500 1477.76,2678.54 P2.4@1626.65,2827.44
A_LIMT: U4.28
BOOT0: R102.2 U4.44 | length 409.2
  Top Layer w11.81: U4.44@3726.38,1074.8 3726.38,1021.65 3759.84,988.19 3901.57,988.19 R102.2@4019.68,870.08
EXIO: R91.1 U4.46 | length 658.7
  Top Layer w11.81: U4.46@3765.75,1074.8 v1(3765.75,1167.32) ; v1(4129.92,968.5) 4181.1,917.32 R91.1@4181.1,870.08
  Bottom Layer w11.81: v1(3765.75,1167.32) 3887.8,1167.32 4086.61,968.5 v1(4129.92,968.5)
GND: C1.2 C2.2 C5.2 C7.2 C9.1 C10.2 C12.2 C13.2 C14.1 C15.2 C16.1 C17.1 C18.1 C19.1 C20.1 C21.2 C22.2 C23.2 C24.2 C25.1 C26.1 C30.2 C31.2 C32.2 C33.2 C34.2 C35.2 C36.2 C37.2 C46.2 C47.2 C48.2 C49.2 C52.1 C54.2 C55.2 C60.1 C61.1 C62.1 C70.2 C80.2 C81.1 C102.1 C106.1 C107.1 C108.1 D4.2 D5.1 D6.1 D10.2 D17.1 DZ4.1 K1.2 K2.2 K2.4 P3.2 P4.2 P5.2 P6.2 P7.2 P8.2 P9.2 P10.4 P10.5 P10.6 P11.2 P12.2 P13.2 P14.2 P16.2 P18.3 P18.4 P23.2 P24.1 P25.1 P27.2 P50.1 pad.4 pad.5 Q1.3 Q2.3 Q3.3 R7.1 R8.1 R29.2 R30.1 R31.2 R32.1 R33.2 R34.1 R35.2 R36.1 R41.1 R42.1 R43.1 R44.1 R49.2 R50.2 R51.2 R53.1 R54.1 R55.1 R56.1 R57.2 R70.1 R75.2 R76.1 R100.1 R102.1 U1.2 U2.3 U2.5 U3.1 U4.8 U4.20 U4.23 U4.35 U4.47 U5.1 U6.1 U8.3 U8.18 U8.29 U9.3 U9.18 U9.29 U10.3 U10.18 U10.29 U11.3 U11.18 U11.29 U15.3 U16.3 | length 5130.7
  Top Layer w11.81: C55.2@1409.45,928.14 C54.2@1409.45,1015.75 1374.02,1015.75 1350.39,1039.37 1350.39,1098.43 1429.13,1177.17 C23.2@1528.56,1177.17 1528.56,1217.53 1539.37,1228.35 1610.24,1228.35 1653.15,1185.43 U6.1@1684.21,1185.43 ; DZ4.1@1645.67,2578.74 1685.04,2578.74 R57.2@1751.97,2511.81 1759.84,2519.69 Q3.3@1933.07,2519.69 ; U8.3@2696.86,2224.42 2775.58,2224.42 U8.29@2795.28,2204.72 U8.18@2893.71,2204.72 ; v1(2708.66,1960.38) 2739.91,1929.13 2739.91,1874.02 2770.41,1843.52 C46.2@2779.53,1843.52 ; C26.1@2947.83,877.95 2947.83,865.15 3027.56,944.88 3027.56,986.76 3018.26,996.06 ; C20.1@2947.83,1118.11 v1(2995.07,1118.11) 2995.07,1115.17 R70.1@3074.81,1035.43 3074.81,1051.18 3136.8,1113.18 C17.1@3136.8,1118.11 ; 3224.41,2043.31 3224.41,2035.43 ; v1(3224.41,2094.49) 3224.41,2035.43 ; C62.1@3228.35,869.08 3228.35,901.57 v1(3244.09,917.32) ; U9.3@3251.19,2224.42 3329.91,2224.42 U9.29@3349.61,2204.72 U9.18@3448.04,2204.72 ; 3264.81,1961.38 3274.51,1951.68 ; C47.2@3326.56,1844.51 3296.06,1875.01 3296.06,1930.13 3274.51,1951.68 ; C106.1@3413.39,1132.86 3420.26,1125.98 v1(3456.69,1125.98) 3486.22,1155.51 U4.35@3527.56,1155.51 ; C61.1@3464.57,869.08 3464.57,884.25 P50.1@3556.69,976.38 ; U4.23@3608.27,1413.39 3608.27,1360.24 3622.05,1346.46 ; U4.20@3667.32,1413.39 3667.32,1360.24 3653.54,1346.46 3622.05,1346.46 ; C60.1@3708.66,869.08 v1(3708.66,917.32) ; v1(3740.16,1318.9) 3716.54,1295.28 3673.23,1295.28 3622.05,1346.46 ; v1(3771.65,2102.36) 3771.65,2008.87 3850.39,1930.13 3850.39,1875.01 C48.2@3880.89,1844.51 ; v1(3783.46,1255.91) 3801.18,1273.62 U4.8@3866.14,1273.62 ; U4.47@3785.43,1074.8 3785.43,1029.53 3803.15,1011.81 3854.32,1011.81 ; U10.3@3805.52,2224.42 3884.24,2224.42 U10.29@3903.94,2204.72 U10.18@4002.37,2204.72 ; v1(3854.32,1035.43) 3854.32,1011.81 ; R102.1@4019.68,807.09 4031.5,807.09 4093.49,869.08 4098.43,869.08 4098.43,909.45 4074.8,933.07 3988.19,933.07 3909.45,1011.81 3854.32,1011.81 ; C24.2@4291.34,921.26 4354.33,921.26 4374.02,901.57 4374.02,826.77 4391.73,809.06 U16.3@4448.82,809.06 ; v1(4334.65,2098.43) 4334.65,2000.21 4404.72,1930.13 4404.72,1875.01 C49.2@4435.22,1844.51 ; U11.3@4359.85,2224.42 4438.57,2224.42 U11.29@4458.27,2204.72 U11.18@4556.7,2204.72 ; 3224.41,2035.43 3224.41,2001.78 3274.51,1951.68
  Top Layer w23.62: D10.2@557.12,2290.71 D10.2@558.42,2292.01 ; C19.1@635.83,802.15 636.82,803.15 v3(670.62,803.15) ; C18.1@648.18,1022.63 653.66,1028.1 v3(685.58,1028.1) ; R100.1@782.76,799.21 782.76,797.24 809.4,770.6 809.4,767.92 v3(813.54,763.78) ; R75.2@1039.03,799.01 1041.2,801.18 v3(1081.25,801.18) ; R76.1@1039.06,869.08 1039.06,867.11 1046.93,859.24 1048.9,859.24 1049.87,858.27 v3(1079.28,858.27)
  other v1: 3905.51,610.24 2334.65,921.26 2366.14,921.26 4216.54,925.2 4248.03,925.2 1199.36,937.01 1230.86,937.01 1262.35,937.01 1293.85,937.01 2334.65,952.76 2366.14,952.76 4216.54,956.69 4248.03,956.69 1199.36,968.5 1230.86,968.5 1262.35,968.5 1293.85,968.5 2334.65,984.25 2366.14,984.25 4216.54,988.19 4248.03,988.19 2334.65,1015.75 2366.14,1015.75 4216.54,1019.68 4248.03,1019.68 397.64,1169.29 429.13,1169.29 460.63,1169.29 492.13,1169.29 397.64,1200.79 429.13,1200.79 460.63,1200.79 492.13,1200.79 2141.73,1219.75 2141.73,1251.25 2141.73,1282.74 2141.73,1314.24 2303.15,1318.9 2334.65,1318.9 2366.14,1318.9 2397.64,1318.9 2429.13,1318.9 2460.63,1318.9 2141.73,1345.73 2303.15,1350.39 2334.65,1350.39 2366.14,1350.39 2397.64,1350.39 2429.13,1350.39 2460.63,1350.39 1586.61,1362.2 1618.11,1362.2 2303.15,1381.89 2334.65,1381.89 1586.61,1393.7 1618.11,1393.7 2303.15,1413.39 2334.65,1413.39 1586.61,1425.2 1618.11,1425.2 2503.94,1500 2535.43,1500 2582.68,1500 2614.17,1500 1708.66,1507.87 1740.16,1507.87 1771.65,1507.87 1803.15,1507.87 1834.65,1507.87 2964.57,1519.69 2996.06,1519.69 3027.56,1519.69 2503.94,1531.5 2535.43,1531.5 2582.68,1531.5 2614.17,1531.5 1586.61,1535.43 1618.11,1535.43 1708.66,1539.37 1740.16,1539.37 1771.65,1539.37 1803.15,1539.37 1834.65,1539.37 2964.57,1551.18 2996.06,1551.18 3027.56,1551.18 2503.94,1562.99 2535.43,1562.99 2582.68,1562.99 2614.17,1562.99 1586.61,1566.93 1618.11,1566.93 2503.94,1594.49 2535.43,1594.49 2582.68,1594.49 2614.17,1594.49 1586.61,1598.43 1618.11,1598.43 1086.61,1649.61 1118.11,1649.61 1149.61,1649.61 1181.1,1649.61 1082.68,1681.1 1114.17,1681.1 1145.67,1681.1 1177.17,1681.1 2952.76,1787.86 3362.2,1791.34 3558.81,1854.33 4700.79,1870.08 4191.88,1874.02 1385.83,1881.89 1417.32,1881.89 1448.82,1881.89 1480.31,1881.89 1511.81,1881.89 1543.31,1881.89 1574.8,1881.89 1606.3,1881.89 1637.79,1881.89 1385.83,1913.39 1417.32,1913.39 1448.82,1913.39 1480.31,1913.39 1511.81,1913.39 1543.31,1913.39 1574.8,1913.39 1606.3,1913.39 1637.79,1913.39 1208.2,1976.62 1239.7,1976.62 1208.2,2008.12 1239.7,2008.12 1208.2,2039.61 1239.7,2039.61 1208.66,2070.87 1240.16,2070.87 1208.66,2102.36 1240.16,2102.36 4665.35,2222.5 4696.85,2222.5 4728.35,2222.5 1208.66,2224.41 1240.16,2224.41 4665.35,2254 4696.85,2254 4728.35,2254 1208.66,2255.91 1240.16,2255.91 4665.35,2285.5 4696.85,2285.5 4728.35,2285.5 1208.66,2287.4 1240.16,2287.4 4665.35,2316.99 4696.85,2316.99 4728.35,2316.99 3039.37,2354.79 3070.87,2354.79 3102.36,2354.79 3598.18,2354.33 3629.67,2354.33 3661.17,2354.33 4153.29,2354.33 4184.79,2354.33 4216.29,2354.33 2480.32,2559.06 3015.5,2570.87 3539.37,2570.53 3569.83,2570.87 4093.7,2570.53 4124.16,2570.87 4616.54,2570.53 4648.03,2570.53 4678.49,2570.87 1736.22,2574.8 1767.72,2574.8 1799.21,2574.8 1830.71,2574.8 3016.54,2600.46 3570.87,2600.46 4125.2,2600.46 4679.53,2600.46 1736.22,2606.3 1767.72,2606.3 1799.21,2606.3 1830.71,2606.3 62.69,2632.16 90.25,2632.16 117.81,2632.16 3016.54,2631.95 3570.87,2631.95 4125.2,2631.95 4679.53,2631.95 3016.54,2663.45 3570.87,2663.45 4125.2,2663.45 4679.53,2663.45 3016.54,2694.94 3570.87,2694.94 4125.2,2694.94 4679.53,2694.94 70.87,2740.16 98.43,2740.16 2385.83,2755.91 2417.32,2755.91 70.87,2767.72 98.43,2767.72 2385.83,2787.4 2417.32,2787.4 2385.83,2818.9 2417.32,2818.9 3086.61,2855.57 3586.61,2857.54 2295.28,2858.27 2326.77,2858.27 2358.27,2858.27 2389.76,2858.27 3086.61,2887.07 3586.61,2889.04 2295.28,2889.76 2326.77,2889.76 2358.27,2889.76 2389.76,2889.76 3086.61,2918.57 3586.61,2920.53 3086.61,2950.06 3586.61,2952.03
  other v2: 2945.42,618.11 2945.42,641.73 4270.22,1366.14 4271.65,1442.19 3523.62,1488.19
HOLD: R65.1 U4.39 | length 382.3
  Top Layer w11.81: R65.1@3385.83,870.08 3448.82,933.07 3480.31,933.07 3503.94,956.7 3503.94,1007.87 3515.75,1019.69 3616.14,1019.69 3627.95,1031.5 U4.39@3627.95,1074.8
JP15_2: K1.1 P15.2
MA_DIR: U4.11
MA_STEP: U4.10
MOTOR_EN: R103.1 U4.18 U8.2 U9.2 U10.2 U11.2 | length 4757.9
  Top Layer w11.81: 2645.7,2244.12 2653.54,2244.12 ; U8.2@2696.86,2244.12 2653.54,2244.12 ; v1(3137.8,1763.78) 3137.8,1842.52 3122.05,1858.27 3122.05,2145.67 3220.5,2244.12 U9.2@3251.19,2244.12 ; R103.1@3637.79,1511.81 3665.35,1511.81 v1(3692.91,1484.25) ; v1@3690.94,1482.28 3706.69,1466.54 U4.18@3706.69,1413.39 ; v1(3692.91,1809.84) 3692.91,1842.52 3673.23,1862.2 3673.23,2177.17 3740.19,2244.12 U10.2@3805.52,2244.12 ; 4228.35,1866.14 4228.35,1877.95 ; v1(4232.28,1610.24) 4212.6,1590.55 3700.79,1590.55 3681.1,1610.24 v2(3669.29,1610.24) v1(3122.05,1610.24) 3051.18,1610.24 2866.14,1795.28 2614.17,1795.28 2562.99,1846.46 2562.99,2177.17 2629.95,2244.12 2653.54,2244.12 ; v1(4244.09,1756.69) 4244.09,1846.46 4228.35,1862.2 4228.35,1877.95 ; U11.2@4359.85,2244.12 4322.86,2244.12 4228.35,2149.61 4228.35,1877.95
  Bottom Layer w11.81: v1(3122.05,1610.24) 3122.05,1748.03 v1(3137.8,1763.78) ; v1(3692.91,1484.25) 3669.29,1507.87 v2(3669.29,1610.24) 3669.29,1786.22 v1(3692.91,1809.84) ; v1(4232.28,1610.24) 4232.28,1744.88 v1(4244.09,1756.69)
MS1: P30.1 R49.1 U8.9 U9.9 U10.9 U11.9 | length 3456.5
  Top Layer w11.81: v1(2732.28,2059.06) 2755.88,2082.65 U8.9@2755.88,2106.29 ; v1(3286.61,2059.06) 3310.21,2082.65 U9.9@3310.21,2106.29 ; v1(3840.94,2059.06) 3864.54,2082.65 U10.9@3864.54,2106.29 ; R49.1@4374.01,1244.09 4496.06,1244.09 4645.67,1393.7 4645.67,1486.61 P30.1@4698.43,1539.37 ; v1(4395.28,2059.06) 4418.87,2082.65 U11.9@4418.87,2106.29
  Bottom Layer w11.81: v1(2732.28,2059.06) 2834.65,2059.06 2885.83,2110.24 3066.93,2110.24 3118.11,2059.06 v1(3286.61,2059.06) 3393.7,2059.06 3433.07,2098.43 3708.66,2098.43 3748.03,2059.06 v1(3840.94,2059.06) 3913.39,2059.06 3956.69,2102.36 4118.11,2102.36 4161.42,2059.06 v1(4395.28,2059.06) 4496.06,2059.06 4511.81,2074.8 4751.97,2074.8 4791.34,2035.43 4791.34,1632.28 P30.1@4698.43,1539.37
MS2: P30.3 R50.1 U8.10 U9.10 U10.10 U11.10 | length 3396.1
  Top Layer w11.81: v1(2759.84,2031.5) 2775.58,2047.23 U8.10@2775.58,2106.29 ; v1(3314.17,2031.5) 3329.91,2047.23 U9.10@3329.91,2106.29 ; v1(3868.5,2031.5) 3884.24,2047.23 U10.10@3884.24,2106.29 ; R50.1@4374.02,1326.77 4464.57,1326.77 4547.24,1409.45 4547.24,1488.19 P30.3@4598.43,1539.37 ; v1(4422.83,2031.5) 4438.57,2047.23 U11.10@4438.57,2106.29
  Bottom Layer w11.81: v1(2759.84,2031.5) 2842.52,2031.5 2901.57,2090.55 3055.12,2090.55 3114.17,2031.5 v1(3314.17,2031.5) 3397.64,2031.5 3444.88,2078.74 3696.85,2078.74 3744.09,2031.5 v1(3868.5,2031.5) 3919.46,2031.5 3970.64,2082.68 4106.3,2082.68 4157.48,2031.5 v1(4422.83,2031.5) 4503.94,2031.5 4523.62,2051.18 4740.16,2051.18 4767.72,2023.62 4767.72,1708.66 P30.3@4598.43,1539.37
MS3: P30.5 R51.1 U8.11 U9.11 U10.11 U11.11 | length 3362.1
  Top Layer w11.81: v1(2787.4,2003.94) 2795.28,2011.81 U8.11@2795.28,2106.29 ; v1(3341.73,2003.94) 3349.61,2011.81 U9.11@3349.61,2106.29 ; v1(3896.06,2003.94) 3903.94,2011.81 U10.11@3903.94,2106.29 ; R51.1@4374.01,1409.45 4498.43,1533.86 P30.5@4498.43,1539.37 ; v1(4450.39,2003.94) 4458.27,2011.81 U11.11@4458.27,2106.29
  Bottom Layer w11.81: v1(2787.4,2003.94) 2846.46,2003.94 2913.39,2070.87 3039.37,2070.87 3106.3,2003.94 v1(3341.73,2003.94) 3401.57,2003.94 3456.69,2059.06 3681.1,2059.06 3736.22,2003.94 v1(3896.06,2003.94) 3925.2,2003.94 3984.25,2062.99 4094.49,2062.99 4153.54,2003.94 v1(4450.39,2003.94) 4511.81,2003.94 4539.37,2031.5 4728.35,2031.5 4744.09,2015.75 4744.09,1720.47 4625.98,1602.36 4531.5,1602.36 4498.43,1569.29 P30.5@4498.43,1539.37
MX_1A: P19.3 U8.24 | length 772.4
  Top Layer w11.81: U8.24@2814.98,2303.14 v1(2814.98,2397.62)
  Bottom Layer w31.5: P19.3@2756.69,2893.7 2756.69,2815.75 2716.54,2775.59 2716.54,2377.95 2744.09,2350.39 2795.28,2350.39 2814.98,2370.09 v1(2814.98,2397.62)
MX_1B: P19.4 pad.3@2925.48,2293.59 U8.21 | length 1173.7
  Top Layer w11.81: U8.21@2893.71,2263.82 2917.37,2263.82 2925.2,2271.65
  Top Layer w23.62: 2925.48,2275.87 pad.3@2925.48,2293.59
  Bottom Layer w31.5: P19.4@2656.69,2893.7 2656.69,2932.28 2688.98,2964.57 3007.87,2964.57 3023.62,2948.82 3023.62,2811.02 2925.48,2712.88 pad.3@2925.48,2293.59
MX_2A: P19.2 U8.26 | length 624.2
  Top Layer w11.81: U8.26@2775.58,2303.14 v1(2775.58,2397.62)
  Bottom Layer w31.5: v1(2775.58,2397.62) 2775.58,2755.89 2856.69,2837.01 P19.2@2856.69,2893.7
MX_2B: P19.1 pad.0@2667.32,2295.28 U8.1 | length 857.7
  Top Layer w11.81: 2667.32,2277.56 2681.06,2263.82 U8.1@2696.86,2263.82
  Top Layer w23.62: 2667.32,2277.56 pad.0@2667.32,2295.28
  Bottom Layer w31.5: pad.0@2667.32,2295.28 2814.96,2295.28 2865.4,2345.71 2865.4,2755.16 2956.69,2846.46 P19.1@2956.69,2893.7
MX_DIR: J7.4 U4.17 U8.19 | length 1474.8
  Top Layer w11.81: U8.19@2893.71,2224.42 2917.31,2224.42 2992.13,2149.61 ; v1(2992.13,2000) 2992.13,2149.61 ; 2992.13,2125.98 2992.13,2149.61 ; v1(3200.79,1582.68) 3227.56,1555.91 3664.57,1555.91 3726.38,1494.09 U4.17@3726.38,1413.39
  Bottom Layer w11.81: v1(2992.13,2000) 3035.43,2000 3170.08,1865.35 J7.4@3170.08,1708.66 3170.08,1613.39 v1(3200.79,1582.68)
MX_STEP: J7.2 U4.16 U8.16 | length 1362.5
  Top Layer w11.81: U8.16@2893.71,2165.32 2914.37,2165.32 2933.07,2146.63 v1(2933.07,2043.31) ; v1@3370.08,1578.74 v1(3370.08,1582.68) 3673.23,1582.68 3694.88,1561.03 3746.06,1509.84 U4.16@3746.06,1413.39
  Bottom Layer w11.81: v1(2933.07,2043.31) 3035.43,2043.31 J7.2@3370.08,1708.66 v1(3370.08,1582.68) v1@3370.08,1578.74
MY1_1A: P20.3 U9.24 | length 747.9
  Top Layer w11.81: U9.24@3369.31,2303.14 v1(3369.31,2397.62)
  Bottom Layer w31.5: P20.3@3259.84,2893.7 3259.84,2401.58 3307.09,2354.33 3350.39,2354.33 3369.31,2373.24 v1(3369.31,2397.62)
MY1_1B: P20.4 pad.3@3479.81,2293.59 U9.21 | length 1158.8
  Top Layer w11.81: U9.21@3448.04,2263.82 3471.7,2263.82 3479.53,2271.65
  Top Layer w23.62: 3479.81,2275.87 pad.3@3479.81,2293.59
  Bottom Layer w31.5: P20.4@3159.84,2893.7 3159.84,2939.37 3185.04,2964.57 3507.87,2964.57 3531.5,2940.94 3531.5,2807.09 3479.81,2755.4 pad.3@3479.81,2293.59
MY1_2A: P20.2 U9.26 | length 603
  Top Layer w11.81: U9.26@3329.91,2303.14 v1(3329.91,2397.62)
  Bottom Layer w31.5: v1(3329.91,2397.62) 3329.91,2798.41 3359.84,2828.35 P20.2@3359.84,2893.7
MY1_2B: P20.1 pad.0@3221.65,2295.28 U9.1 | length 830.1
  Top Layer w11.81: 3221.65,2277.56 3235.39,2263.82 U9.1@3251.19,2263.82
  Top Layer w23.62: 3221.65,2277.56 pad.0@3221.65,2295.28
  Bottom Layer w31.5: pad.0@3221.65,2295.28 3358.27,2295.28 3419.73,2356.74 3419.73,2774.06 3459.84,2814.17 P20.1@3459.84,2893.7
MY2_1A: P21.2 U10.24 | length 616
  Top Layer w11.81: U10.24@3923.64,2303.14 v1(3923.64,2397.62)
  Bottom Layer w31.5: P21.2@3862.2,2893.7 3862.2,2519.69 3923.64,2458.25 v1(3923.64,2397.62)
MY2_1B: P21.1 pad.3@4034.14,2293.59 U10.21 | length 682.4
  Top Layer w11.81: U10.21@4002.37,2263.82 4026.03,2263.82 4033.86,2271.65
  Top Layer w23.62: 4034.14,2275.87 pad.3@4034.14,2293.59
  Bottom Layer w31.5: P21.1@3962.2,2893.7 4034.14,2821.77 pad.3@4034.14,2293.59
MY2_2A: P21.3 U10.26 | length 641.1
  Top Layer w11.81: U10.26@3884.24,2303.14 v1(3884.24,2397.62)
  Bottom Layer w31.5: P21.3@3762.2,2893.7 3762.2,2519.66 v1(3884.24,2397.62)
MY2_2B: P21.4 pad.0@3775.98,2295.28 U10.1 | length 698.5
  Top Layer w11.81: 3775.98,2277.56 3789.72,2263.82 U10.1@3805.52,2263.82
  Top Layer w23.62: 3775.98,2277.56 pad.0@3775.98,2295.28
  Bottom Layer w31.5: P21.4@3662.2,2893.7 3662.2,2538.58 3775.98,2424.8 pad.0@3775.98,2295.28
MY_DIR: J8.4 J9.4 U4.15 U9.19 U10.19 | length 2088.2
  Top Layer w11.81: U9.19@3448.04,2224.42 3471.64,2224.42 3503.54,2192.52 3546.46,2149.61 3546.46,2133.85 ; v1(3543.31,2003.94) 3546.46,2007.09 3546.46,2133.85 ; 3546.46,2125.98 3546.46,2133.85 ; J8.4@3724.8,1755.91 3772.05,1708.66 3960.63,1708.66 v1(3972.44,1720.47) ; U4.15@3765.75,1413.39 3765.75,1513.78 v1(3775.59,1523.62) ; U10.19@4002.37,2224.42 4025.97,2224.42 4098.43,2151.97 v1(4098.43,2011.81)
  Bottom Layer w11.81: v1(3543.31,2003.94) 3668.5,2003.94 3724.8,1947.64 J8.4@3724.8,1755.91 3724.8,1751.97 J9.4@3724.8,1637.8 ; J9.4@3724.8,1629.92 J9.4@3724.8,1637.8 ; J9.4@3742.13,1620.47 J9.4@3724.8,1637.8 ; v1(3775.59,1523.62) 3775.59,1587.01 J9.4@3724.8,1637.8 ; v1(3972.44,1720.47) 3996.06,1696.85 4062.99,1696.85 4145.67,1779.53 4145.67,1964.57 v1(4098.43,2011.81)
MY_STEP: J8.2 J9.2 U4.14 U9.16 U10.16 | length 1556.9
  Top Layer w11.81: U9.16@3448.04,2165.32 3468.7,2165.32 3487.4,2146.63 3487.4,2032.28 v1(3488.19,2031.5) ; U4.14@3785.43,1413.39 3785.43,1470.47 v1(3866.14,1551.18) ; U10.16@4002.37,2165.32 4023.03,2165.32 4041.73,2146.63 4041.73,2133.85 ; v1(4039.37,2035.43) 4041.73,2037.8 4041.73,2133.85 ; 4041.73,2125.98 4041.73,2133.85
  Bottom Layer w11.81: v1(3488.19,2031.5) 3673.23,2031.5 3811.42,1893.31 3924.8,1893.31 ; v1(3866.14,1551.18) 3924.8,1609.84 J9.2@3924.8,1637.8 ; J9.2@3929.13,1633.46 J9.2@3924.8,1637.8 ; v1(4039.37,2035.43) 4039.37,2007.87 3924.8,1893.31 ; J9.2@3924.8,1637.8 J8.2@3924.8,1755.91 3924.8,1893.31
MZ_1A: P22.2 U11.24 | length 637.2
  Top Layer w11.81: U11.24@4477.97,2303.14 v1(4477.97,2397.62)
  Bottom Layer w31.5: P22.2@4365.35,2893.7 4365.35,2837.34 4477.97,2724.72 4477.97,2439.36 4477.97,2417.32 v1(4477.97,2397.62)
MZ_1B: P22.1 pad.3@4588.47,2293.59 U11.21 | length 703.6
  Top Layer w11.81: U11.21@4556.7,2263.82 4580.36,2263.82 4588.19,2271.65
  Top Layer w23.62: 4588.47,2275.87 pad.3@4588.47,2293.59
  Bottom Layer w31.5: P22.1@4465.35,2893.7 4465.35,2818.9 4539.37,2744.88 4539.37,2342.68 pad.3@4588.47,2293.59
MZ_2A: P22.3 U11.26 | length 662.3
  Top Layer w11.81: U11.26@4438.57,2303.14 v1(4438.57,2397.62)
  Bottom Layer w31.5: P22.3@4265.35,2893.7 4265.35,2854.66 4425.2,2694.82 4425.2,2410.99 v1(4438.57,2397.62)
MZ_2B: P22.4 pad.0@4330.31,2295.28 U11.1 | length 719.7
  Top Layer w11.81: 4330.31,2277.56 4344.05,2263.82 U11.1@4359.85,2263.82
  Top Layer w23.62: 4330.31,2277.56 pad.0@4330.31,2295.28
  Bottom Layer w31.5: P22.4@4165.35,2893.7 4165.35,2874.02 4330.31,2709.06 pad.0@4330.31,2295.28
MZ_DIR: J6.4 U4.13 U11.19 | length 1753
  Top Layer w11.81: U4.13@3805.12,1413.39 3804.64,1413.86 3804.64,1450.31 3921.26,1566.93 4244.88,1566.93 v1(4285.83,1607.87) ; U11.19@4556.7,2224.42 4580.3,2224.42 4655.12,2149.61 ; 4655.12,2125.98 4655.12,2149.61 ; v1(4708.66,2000) 4655.12,2053.54 4655.12,2149.61
  Bottom Layer w11.81: v1(4285.83,1607.87) 4285.83,1625.98 ; J6.4@4285.83,1708.66 4285.83,1625.98 ; v1(4708.66,2000) 4661.42,1952.76 4661.42,1669.29 4618.11,1625.98 4285.83,1625.98
MZ_STEP: J6.2 U4.12 U11.16 | length 1604.9
  Top Layer w11.81: U4.12@3866.14,1352.36 3866.14,1472.44 3940.94,1547.24 4299.21,1547.24 4460.63,1708.66 J6.2@4485.83,1708.66 ; U11.16@4556.7,2165.32 4577.36,2165.32 4596.06,2146.63 ; 4596.06,2125.98 4596.06,2146.63 ; v1(4622.05,1992.13) 4622.05,2000 4596.06,2025.98 4596.06,2146.63
  Bottom Layer w11.81: J6.2@4485.83,1708.66 4485.83,1667.72 4504.88,1648.66 4609.29,1648.66 4637.95,1677.32 4637.95,1976.22 v1(4622.05,1992.13)